# Altium PCB auto.PcbDoc
Units mm, origin at the board's own origin, x right, y up, seen from the top; angles counter-clockwise.
Board outline 78.5 x 62.5 mm, 2 copper layers (Top Layer, Bottom Layer), stack 1.671 mm thick; 17 components, 10 nets, 71 pads, 0 vias.
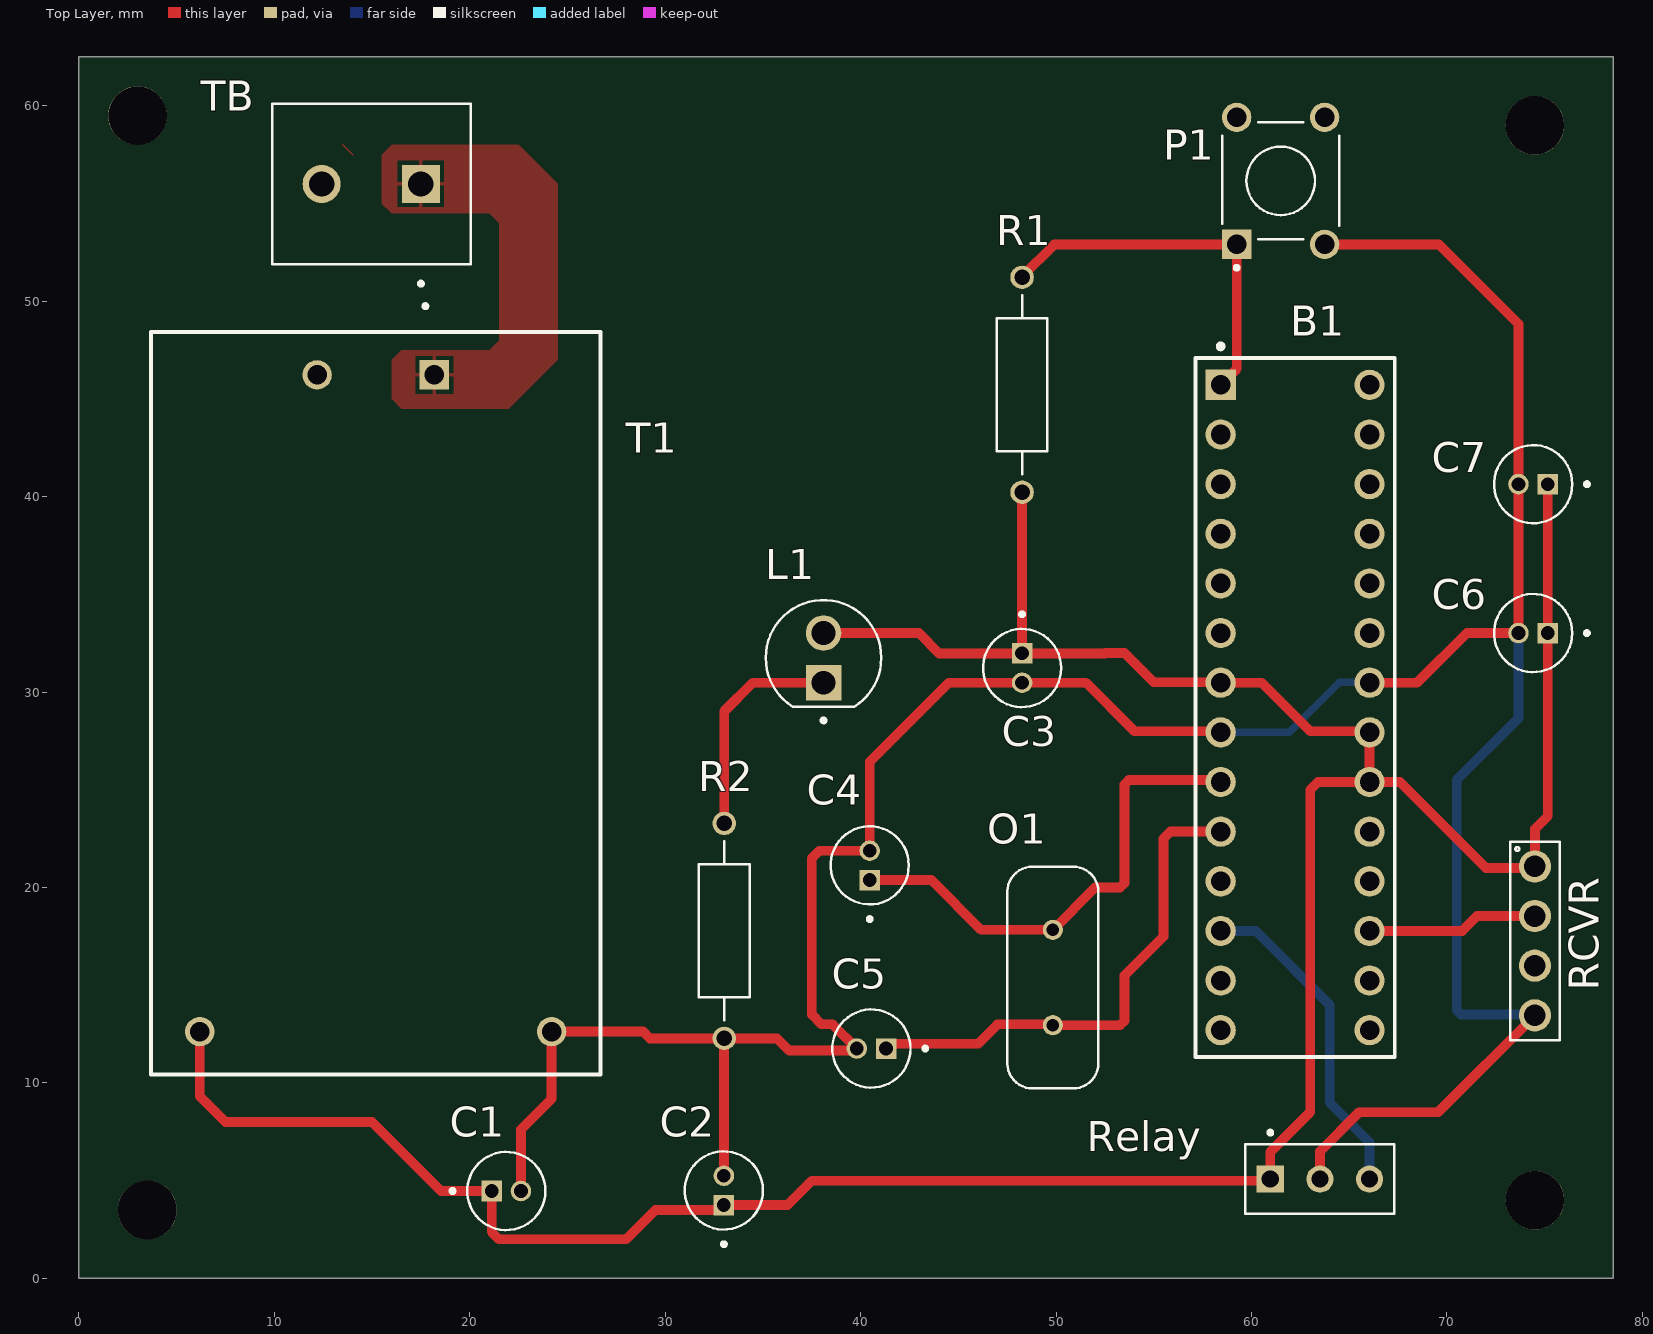
[diagram p0: Top Layer view]
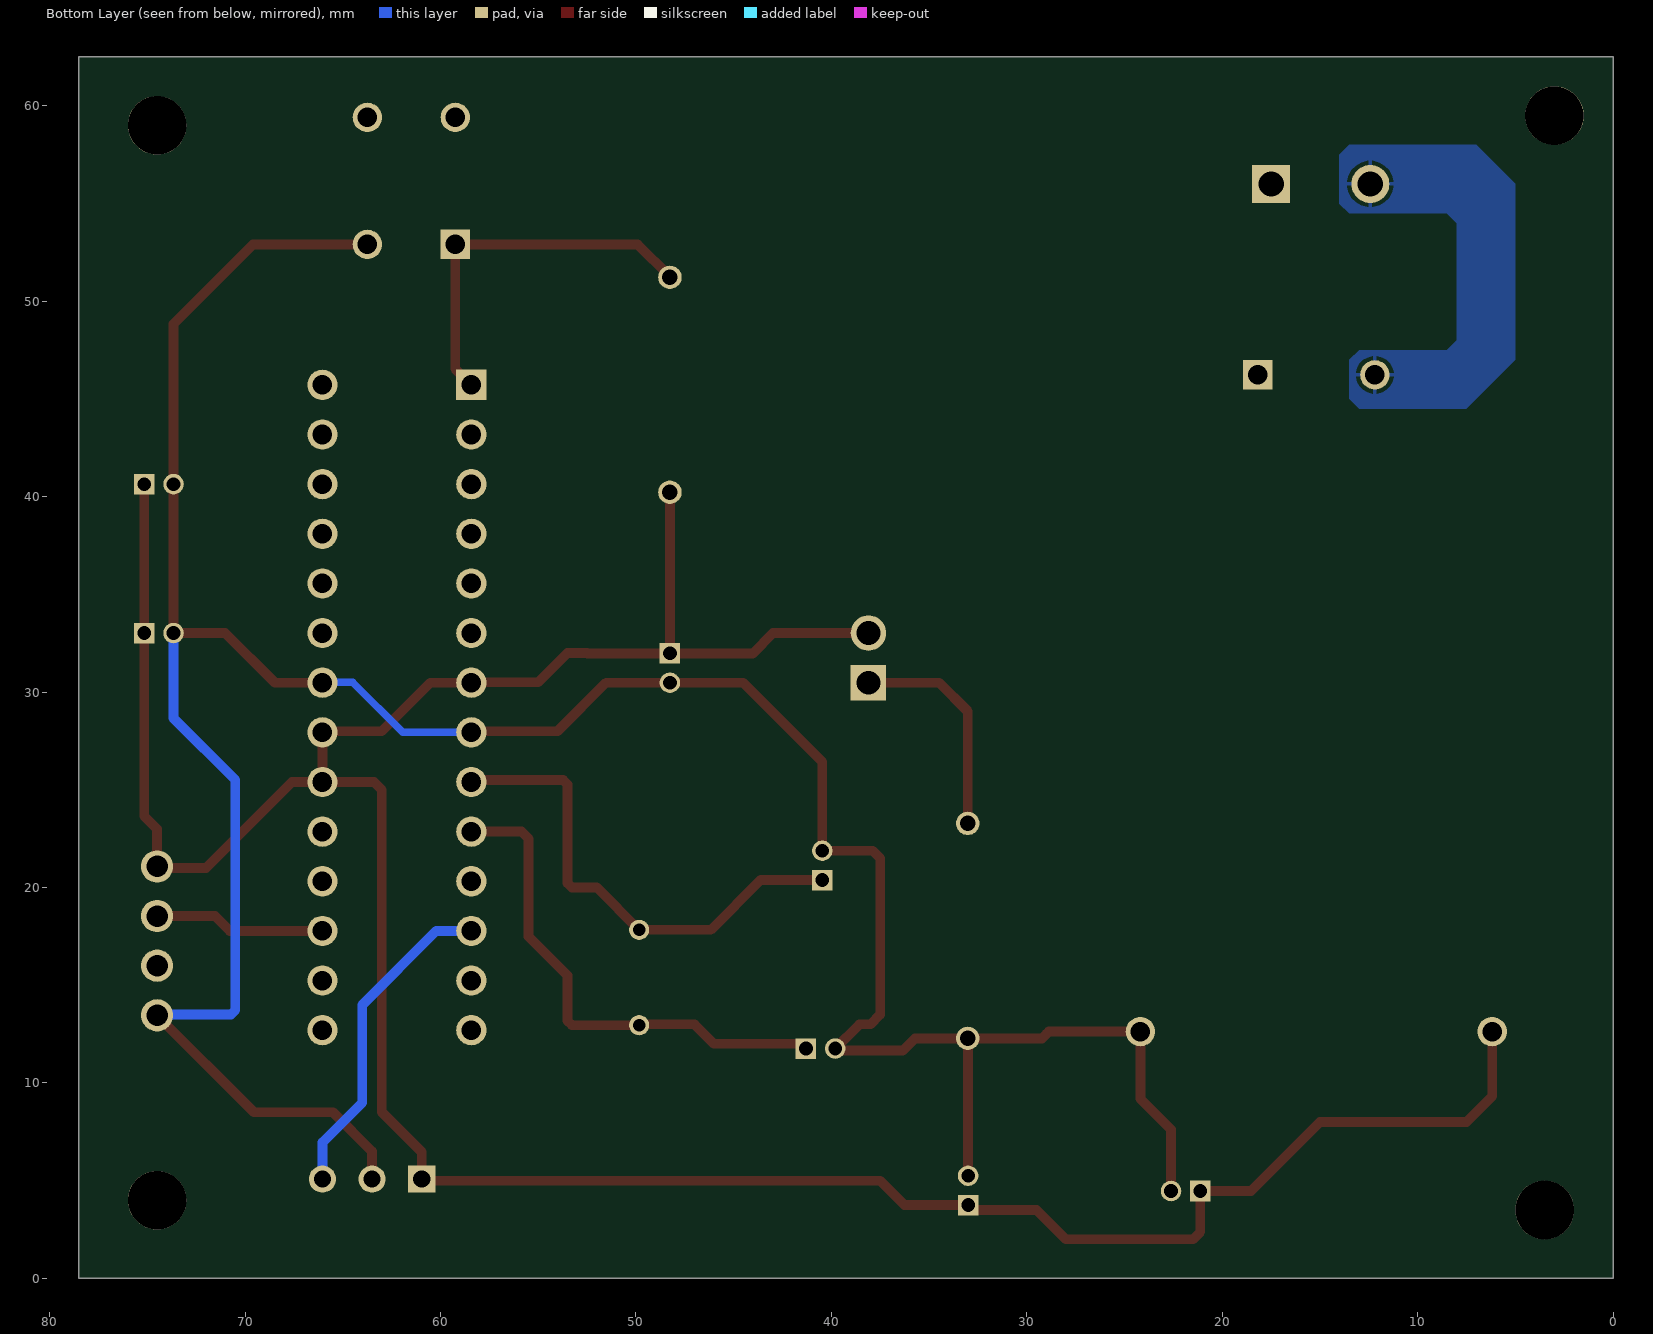
[diagram p1: Bottom Layer view, seen from below]
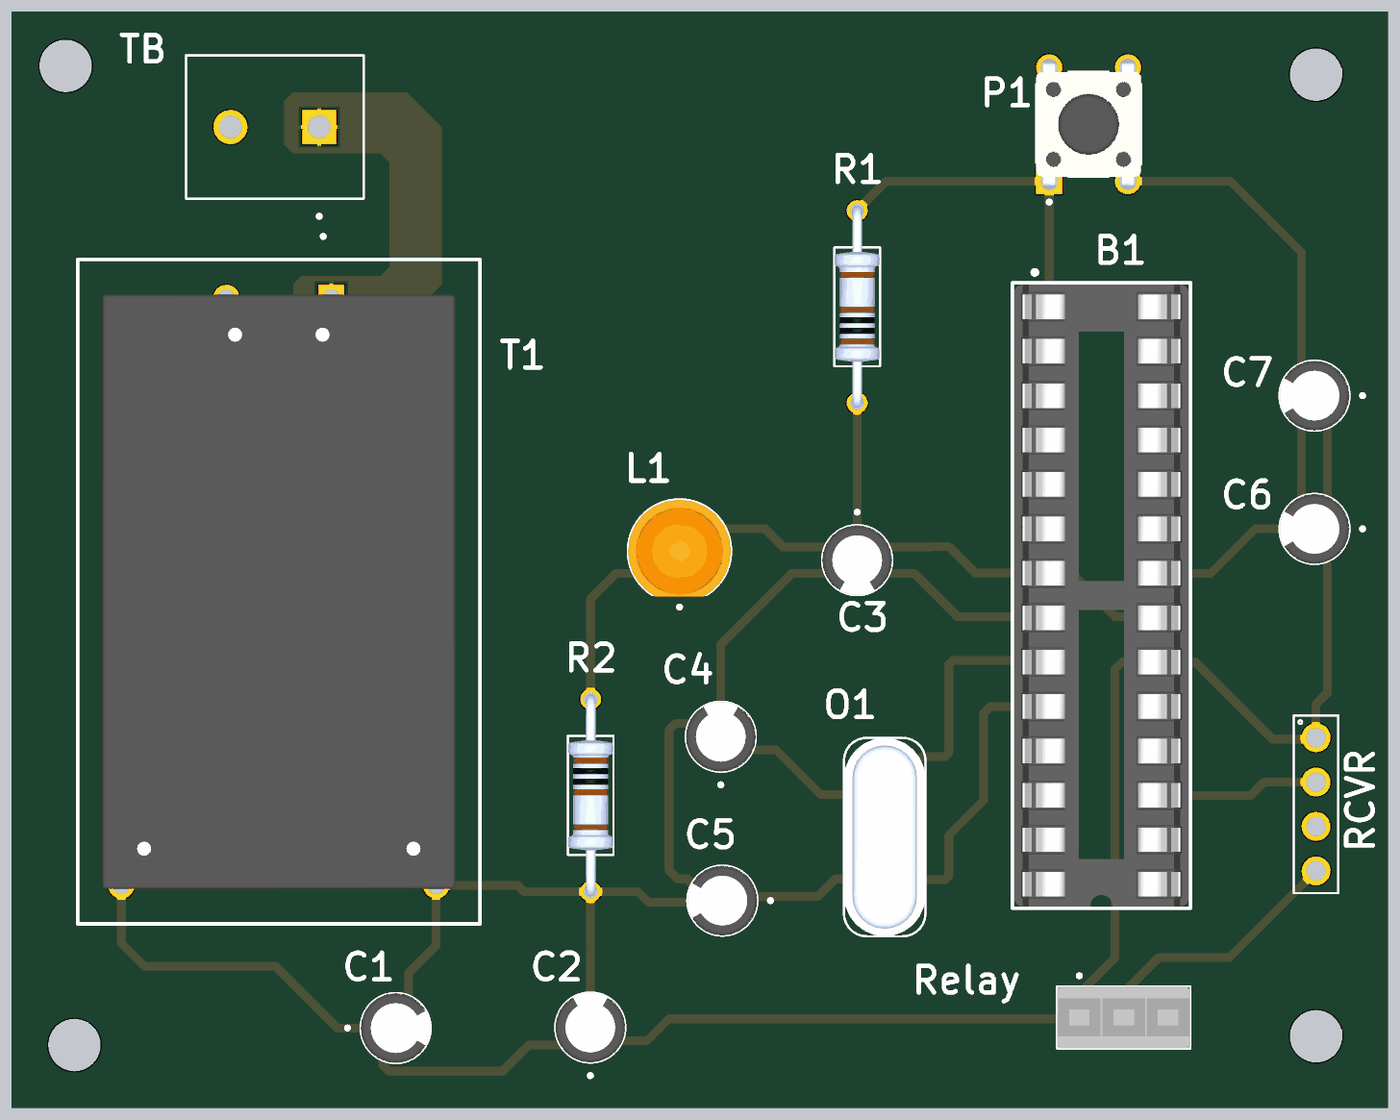
[diagram p2: 3D render of the assembled board from above, using the file's embedded part models]

## Layer stack, top to bottom
Top Solder: solder mask 0.0102, Solder Resist, Dk 3.5
Top Layer: signal copper 0.0356
Dielectric 1: dielectric 1.6, FR-4, Dk 4.8
Bottom Layer: signal copper 0.0356
Bottom Solder: solder mask 0.0102, Solder Resist, Dk 3.5

## Board outline
0,0 78.5,0 78.5,62.5 0,62.5

## Design rules (kind name [scope] priority, off if disabled: settings)
BoardOutlineClearance [All] p1: gap=0.2 ignorepadtopadclearanceinfootprint=FALSE
Clearance [All] p1: gap=0.203 ignorepadtopadclearanceinfootprint=FALSE except(0.25: Arc-Hole Track-Hole SMDPad-Hole THPad-Hole Via-Hole Fill-Hole Poly-Hole Region-Hole Text-Hole)
ComponentClearance [All] p1: gap=0.127 collisioncheckmode=3 verticalgap=0.127 showdistances=TRUE
DiffPairsRouting [All] p1: maxlimit=0.381 minlimit=0.203 mostfreqgap=0.203 toplayer_minwidth=0.203 toplayer_maxwidth=25.4 toplayer_prefwidth=0.203 bottomlayer_minwidth=0.203 bottomlayer_maxwidth=25.4 bottomlayer_prefwidth=0.203 maxuncoupledlength=12.7
Height [All] p1: minheight=0 maxheight=1816.048 prefheight=12.7
HoleSize [All] p1: absolutevalues=TRUE maxlimit=6.3 minlimit=0.3 maxpercent=80.000 minpercent=20.000
HoleToHoleClearance [All] p1: gap=0.25 allowstackedmicrovias=FALSE
MinimumAnnularRing [All] p1: minimumring=0.076
MinimumSolderMaskSliver [All] p1: minsoldermaskwidth=0
PlaneClearance [All] p1: clearance=0.203
PlaneConnect PlaneConnectPowerPads [InPadClass('PowerPads')] p1: planeconnectstyle=Direct reliefexpansion=0.508 reliefentries=4 reliefconductorwidth=0.254 reliefairgap=0.254
PlaneConnect [All] p2: pad.planeconnectstyle=Relief pad.reliefexpansion=0.3 pad.reliefentries=4 pad.reliefconductorwidth=0.203 pad.reliefairgap=0.203 via.planeconnectstyle=Direct via.reliefexpansion=0.3 via.reliefentries=4 via.reliefconductorwidth=0.127 via.reliefairgap=0.127
PolygonConnect PolygonConnectPowerPads [All vs (InPadClass('PowerPads'))] p1: connectstyle=Direct reliefconductorwidth=0.254 reliefentries=4 polygonreliefangle="90 Angle" airgapwidth=0.254
PolygonConnect [All] p2: thpad.connectstyle=Relief thpad.reliefconductorwidth=0.203 thpad.reliefentries=4 thpad.polygonreliefangle="90 Angle" thpad.airgapwidth=0.203 smdpad.connectstyle=Relief smdpad.reliefconductorwidth=0.203 smdpad.reliefentries=4 smdpad.polygonreliefangle="90 Angle" smdpad.airgapwidth=0.203 via.connectstyle=Direct via.reliefconductorwidth=0.127 via.reliefentries=4 via.polygonreliefangle="90 Angle" via.airgapwidth=0.127
RoutingVias [All] p1: holewidth=0.3 width=0.6 viastyle="Through Hole" minholewidth=0.3 minwidth=0.6 maxholewidth=0.6 maxwidth=6.6
SilkToSilkClearance [All] p1: silktosilkclearance=0
SilkToSolderMaskClearance [IsPad] p1: minsilkscreentomaskgap=0.127 clearancetoexposedcopper=TRUE
SolderMaskExpansion [All] p1: expansion=0.075 istentingtop=FALSE
Width [All] p1: maxlimit=25.4 minlimit=0.203 preferedwidth=0.203 minimp=50.000000 maximp=50.000000 favimp=50.000000
20 further rules are at their usual default settings.

## Components (designator, comment, footprint, x,y, rotation, side; value= is the part's Value field where it differs from the comment)
B1 "1-2199298-8" FP-1-2199298-9-MFG 62.23,29.21 r270 top
C1 "K102K15X7RF5TL2" 10UF_CAPACITOR 21.869,4.47 r0 top value=1nF
C2 "EEA-GA1C100" 10UF_CAPACITOR 33,4.5 r90 top
C3 "EEA-GA1C100" 10UF_CAPACITOR 48.26,31.23 r270 top
C4 "S220K25SL0N63L6R" 10UF_CAPACITOR 40.462,21.133 r90 top
C5 "S220K25SL0N63L6R" 10UF_CAPACITOR 40.55,11.76 r180 top
C6 "EEA-GA1C100" 10UF_CAPACITOR 74.41,33.02 r180 top
C7 "EEA-GA1C100" 10UF_CAPACITOR 74.41,40.64 r180 top
L1 "WP7113SRD/J4" LEDRD254W57D500H1070 38.1,31.75 r90 top
O1 "ECS-160-20-4_1" OSCILLATOR 49.835,15.394 r270 top value=16MHz
P1 "COM-00097" P_BUTTON 61.493,56.159 r90 top
R1 "CFM12JT1K00" RESISTER 48.26,45.72 r90 top value=1kR
R2 "CFM12JT220R" RESISTER 33.02,17.78 r270 top value=220R
RCVR "61300411121" 61300411121 74.5,17.27 r270 top
Relay "61300311121" FEMALE 63.5,5.08 r0 top
T1 "Transformer" HILINK 15.186,29.428 r270 top
TB "TB006-508-02BE" TERMINALBOX 17.5,56 r180 top

## Footprints (in the part's own frame and the unit in brackets; to place one, negate y for a bottom-side part, rotate by r counter-clockwise, add the part's x,y. Pads: shape width x height; smd on the part's side, far side on the other; paste and mask are expansions set on the pad)
10UF_CAPACITOR [mm]
  rect 1.05x1.05 hole 0.7: 1(-0.75,0)
  round 1.05 hole 0.7: 2(0.75,0)
  silkscreen extent -2.85,-2 2,2, body extent -2,-2 2,2, height 7
61300411121 [mm]
  round 1.65 hole 1.1: 1(-3.81,0) 2(-1.27,0) 3(1.27,0) 4(3.81,0)
  silkscreen extent -5.08,-1.27 5.08,1.27
FEMALE [mm]
  rect 1.388x1.388 hole 0.88: 1(-2.54,0)
  round 1.388 hole 0.88: 2(0,0) 3(2.54,0)
  silkscreen extent -3.81,-1.78 3.81,2.48, body extent -3.81,-1.78 3.81,1.78, height 6.74
FP-1-2199298-9-MFG [mm]
  rect 1.55x1.55 hole 1 paste-1000 mask+0: 1(-16.51,-3.81)
  round 1.55 hole 1 paste-1000 mask+0: 2(-13.97,-3.81) 3(-11.43,-3.81) 4(-8.89,-3.81) 5(-6.35,-3.81) 6(-3.81,-3.81) 7(-1.27,-3.81) 8(1.27,-3.81) 9(3.81,-3.81) 10(6.35,-3.81) 11(8.89,-3.81) 12(11.43,-3.81) 13(13.97,-3.81) 14(16.51,-3.81) 15(16.51,3.81) 16(13.97,3.81) 17(11.43,3.81) 18(8.89,3.81) 19(6.35,3.81) 20(3.81,3.81) 21(1.27,3.81) 22(-1.27,3.81) 23(-3.81,3.81) 24(-6.35,3.81) 25(-8.89,3.81) 26(-11.43,3.81) 27(-13.97,3.81) 28(-16.51,3.81)
  silkscreen extent -18.6,-5.1 17.88,5.1, body extent -17.98,-5.2 17.98,5.2, height 0.25
HILINK [mm]
  rect 1.508x1.508 / inner round 1.508 / far side rect 1.508x1.508 hole 1: 1(-16.8,3)
  round 1.508 hole 1: 2(-16.8,-3) 3(16.8,9) 4(16.8,-9)
  silkscreen extent -20.42,-11.5 19,11.5, body extent -17,-10.1 17,10.1, height 15
LEDRD254W57D500H1070 [mm]
  round 1.815 hole 1.21: 1(1.27,0)
  rect 1.815x1.815 / inner round 1.815 / far side rect 1.815x1.815 hole 1.21: 2(-1.27,0)
  silkscreen extent -3.3,-2.96 2.96,2.96, body extent -2.6,-2.95 2.95,2.95, height 9.1
OSCILLATOR [mm]
  round 1.03 hole 0.63: 1(-2.44,0) 2(2.44,0)
  silkscreen extent -5.68,-2.33 5.68,2.33, body extent -5.68,-2.32 5.68,2.32, height 3.51
P_BUTTON [mm]
  rect 1.498x1.498 / inner round 1.498 / far side rect 1.498x1.498 hole 0.99: 1(-3.25,2.25)
  round 1.498 hole 0.99: 2(-3.25,-2.25) 3(3.25,-2.25) 4(3.25,2.25)
  silkscreen extent -4.54,-3 3,3, body extent -3.9,-3 3.9,3, height 5.01
RESISTER [mm]
  round 1.2 hole 0.8: 1(-5.5,0) 2(5.5,0)
  silkscreen extent -4.58,-1.3 4.58,1.3, body extent -5.77,-1.3 5.77,1.3, height 2.6
TERMINALBOX [mm]
  rect 1.95x1.95 / inner round 1.95 / far side rect 1.95x1.95 hole 1.3: 1(0,0)
  round 1.95 hole 1.3: 2(5.08,0)
  silkscreen extent -2.54,-4.1 7.62,5.2

## Part data
B1: "IC Socket", Manufacturer="TE Connectivity", Manufacturer Series=2199298, Supplier Part Number=571-1-2199298-8, Category="IC and Component Sockets", ComponentLink1Description=https://www.te.com:443/usa-en/product-1-2199298-8.datasheet.pdf?src-supplier=IHS+Markit, ComponentLink1URL=https://www.te.com:443/usa-en/product-1-2199298-8.datasheet.pdf?src-supplier=IHS+Markit, ComponentLink2Description=http://www.alliedelec.com/m/d/1cf61418f54f295ea6d222d573753863.pdf?src-supplier=Allied+Electronics, ComponentLink2URL=http://www.alliedelec.com/m/d/1cf61418f54f295ea6d222d573753863.pdf?src-supplier=Allied+Electronics, ComponentLink3Description=https://www.te.com/commerce/DocumentDelivery/DDEController?Action=srchrtrv&amp;DocNm=2199298&amp;DocType=Customer+Drawing&amp;DocLang=English&src-supplier=Digi-Key, ComponentLink3URL=https://www.te.com/commerce/DocumentDelivery/DDEController?Action=srchrtrv&amp;DocNm=2199298&amp;DocType=Customer+Drawing&amp;DocLang=English&src-supplier=Digi-Key, ComponentLink4Description=http://www.te.com/commerce/DocumentDelivery/DDEController?Action=showdoc&DocId=Customer+Drawing%7F2199298%7FA%7Fpdf%7FEnglish%7FENG_CD_2199298_A_baseFilename.pdf&src-supplier=Avnet, ComponentLink4URL=http://www.te.com/commerce/DocumentDelivery/DDEController?Action=showdoc&DocId=Customer+Drawing%7F2199298%7FA%7Fpdf%7FEnglish%7FENG_CD_2199298_A_baseFilename.pdf&src-supplier=Avnet, Contact Finish - Mating=TIN, Contact Material=Bronze, Device Socket Type="IC SOCKET", Manufacturer Part Number=1-2199298-8, Pricing="1=0.39, 10=0.379, 50=0.379, 100=0.379, 1000=0.379, 10000=0.307 (USD)", Reach SVHC Compliant=Yes, RoHS=Yes, RoHS Compliant=Yes, Stock=5353, Supplier=Mouser
C1: "Ceramic Capacitor, Multilayer, Ceramic, 50V, 10% +Tol, 10% -Tol, X7R, 15% TC, 0.001uF, Through Hole Mount", Capacitance=1nF, Capacitor Type=Ceramic, Manufacturer="Vishay BCcomponents", Max Operating Temperature=125°C, Min Operating Temperature=-55°C, Package Shape=Rectangular, Package Style=RadialMeter, Rated DC Voltage (URdc)=50V, Supplier Part Number=594-K102K15X7RF5TL2, Temperature Characteristics Code=X7R, Tolerance  (fill in as +-)=10%, Category="Ceramic Capacitors", ComponentLink1Description=https://datasheet.ciiva.com:443/pdfs/VipMasterIC/IC/VISH/VISHS88539/VISHS88539-1.pdf?src-supplier=IHS+Markit, ComponentLink1URL=https://datasheet.ciiva.com:443/pdfs/VipMasterIC/IC/VISH/VISHS88539/VISHS88539-1.pdf?src-supplier=IHS+Markit, ComponentLink2Description=https://datasheet.ciiva.com/145/kseries-145600.pdf?src-supplier=Digi-Key, ComponentLink2URL=https://datasheet.ciiva.com/145/kseries-145600.pdf?src-supplier=Digi-Key, ComponentLink3Description=https://datasheet.ciiva.com/18442/70121924-18442616.pdf?src-supplier=Allied+Electronics, ComponentLink3URL=https://datasheet.ciiva.com/18442/70121924-18442616.pdf?src-supplier=Allied+Electronics, ComponentLink4Description=https://datasheet.ciiva.com/46394/1756139-46394540.pdf?src-supplier=Element14, ComponentLink4URL=https://datasheet.ciiva.com/46394/1756139-46394540.pdf?src-supplier=Element14, ComponentLink5Description=https://datasheet.ciiva.com/7974/1682830-7974760.pdf?src-supplier=Element14, ComponentLink5URL=https://datasheet.ciiva.com/7974/1682830-7974760.pdf?src-supplier=Element14, ComponentLink6Description=https://datasheet.ciiva.com/145/kseries-145599.pdf?src-supplier=Digi-Key, ComponentLink6URL=https://datasheet.ciiva.com/145/kseries-145599.pdf?src-supplier=Digi-Key, Dielectric Material=Ceramic, Height=5.58mm, JESD-609 Code=e3, Length=4mm, Manufacturer Part Number=K102K15X7RF5TL2, Mounting Technology="Through Hole", Multilayer=Yes, Packaging="Tape and Reel", Pins=2, Pricing="1=0.23, 10=0.104, 50=0.104, 100=0.06, 1000=0.053, 10000=0.041 (USD)", Reach SVHC Compliant=Yes, RoHS=Yes, RoHS Compliant=Yes, Stock=24201, Supplier=Mouser, Terminal Finish=Tin, Terminal Pitch=2.5mm, Termination=Wire, Tolerance (fill in as +-)=10%, Voltage=50V, Width=2.5mm
C2 C3 C6 C7: "Aluminum Electrolytic Capacitor, Polarized, Aluminum (wet), 16V, 20% +Tol, 20% -Tol, 10uF, Through Hole Mount", Capacitance=10uF, Capacitor Type=Aluminium, Leakage Current=3uA, Manufacturer=Panasonic, Manufacturer Series=GA, Max Operating Temperature=105°C, Min Operating Temperature=-55°C, Package Shape=Cylindrical, Package Style=RadialMeter, Rated DC Voltage (URdc)=16V, Ripple Current=30mA, Supplier Part Number=667-EEA-GA1C100, Tolerance  (fill in as +-)=20%, Category="Aluminum Electrolytic Capacitors", ComponentLink1Description=https://datasheet.ciiva.com:443/pdfs/VipMasterIC/IC/PANA/PANA-S-A0007980152/PANA-S-A0007980152-1.pdf?src-supplier=IHS+Markit, ComponentLink1URL=https://datasheet.ciiva.com:443/pdfs/VipMasterIC/IC/PANA/PANA-S-A0007980152/PANA-S-A0007980152-1.pdf?src-supplier=IHS+Markit, ComponentLink2Description=https://datasheet.ciiva.com/11783/0900766b800bd184-11783675.pdf?src-supplier=Rs, ComponentLink2URL=https://datasheet.ciiva.com/11783/0900766b800bd184-11783675.pdf?src-supplier=Rs, ComponentLink3Description=https://datasheet.ciiva.com/30132/61aba0000ce99-30132280.pdf?src-supplier=Onlinecomponents.com, ComponentLink3URL=https://datasheet.ciiva.com/30132/61aba0000ce99-30132280.pdf?src-supplier=Onlinecomponents.com, ComponentLink4Description=https://datasheet.ciiva.com/2984/aba0000ce99-2984970.pdf?src-supplier=Avnet, ComponentLink4URL=https://datasheet.ciiva.com/2984/aba0000ce99-2984970.pdf?src-supplier=Avnet, ComponentLink5Description=https://datasheet.ciiva.com/14606/70256146-14606495.pdf?src-supplier=Allied+Electronics, ComponentLink5URL=https://datasheet.ciiva.com/14606/70256146-14606495.pdf?src-supplier=Allied+Electronics, ComponentLink6Description=https://datasheet.ciiva.com/43461/1521263-43461069.pdf?src-supplier=Farnell, ComponentLink6URL=https://datasheet.ciiva.com/43461/1521263-43461069.pdf?src-supplier=Farnell, ComponentLink7Description=https://datasheet.ciiva.com/24024/aba0000ce99-48764-24024622.pdf?src-supplier=Mouser, ComponentLink7URL=https://datasheet.ciiva.com/24024/aba0000ce99-48764-24024622.pdf?src-supplier=Mouser, Diameter=4mm, Dielectric Material=Aluminium, JESD-609 Code=e3, Length=7mm, Manufacturer Part Number=EEA-GA1C100, Mounting Technology="Through Hole", Packaging=Bulk, Pins=2, Polarity=Polarized, Pricing="1=0.32, 10=0.216, 50=0.144, 100=0.123, 1000=0.086, 10000=0.086 (USD)", Reach SVHC Compliant=Yes, RoHS=Yes, RoHS Compliant=Yes, Series=EEA-GA, Stock=3224, Supplier=Mouser, Tan Delta=0.18, Terminal Finish=Tin, Terminal Pitch=1.5mm, Termination=Wire, Tolerance (fill in as +-)=20%, Voltage=16V
C4 C5: "Ceramic Capacitor, Ceramic, 1000V, 10% +Tol, 10% -Tol, SL0, 120ppm/Cel TC, 0.000022uF, Through Hole Mount", Capacitance=22pF, Capacitor Type=Ceramic, Manufacturer="Vishay BCcomponents", Supplier Part Number=594-S220K25SL0N63L6R, Voltage=16V, Category="Ceramic Capacitors", ComponentLink1Description=https://datasheet.ciiva.com:443/pdfs/VipMasterIC/IC/VISH/VISH-S-A0003941534/VISH-S-A0003941534-1.pdf?src-supplier=IHS+Markit, ComponentLink1URL=https://datasheet.ciiva.com:443/pdfs/VipMasterIC/IC/VISH/VISH-S-A0003941534/VISH-S-A0003941534-1.pdf?src-supplier=IHS+Markit, ComponentLink2Description=https://datasheet.ciiva.com/148/geninfo-cd-rfi-safcaps-148963.pdf?src-supplier=Digi-Key, ComponentLink2URL=https://datasheet.ciiva.com/148/geninfo-cd-rfi-safcaps-148963.pdf?src-supplier=Digi-Key, ComponentLink3Description=https://datasheet.ciiva.com/7974/gapkap-7974888.pdf?src-supplier=Element14, ComponentLink3URL=https://datasheet.ciiva.com/7974/gapkap-7974888.pdf?src-supplier=Element14, Dielectric Material=Ceramic, Manufacturer Part Number=S220K25SL0N63L6R, Pins=2, Pricing="1=0.4, 10=0.197, 50=0.197, 100=0.169, 1000=0.107, 10000=0.095 (USD)", RoHS=Yes, RoHS Compliant=Yes, Stock=23582, Supplier=Mouser
L1: "LED Uni-Color SB. Red 660nm 2-Pin T-1 3/4 Bulk", Manufacturer=Kingbright, Supplier Part Number=754-2139-ND, Category=LEDs, ComponentLink1Description=http://www.kingbrightusa.com/images/catalog/SPEC/WP7113SRD-J4.pdf?src-supplier=Digi-Key, ComponentLink1URL=http://www.kingbrightusa.com/images/catalog/SPEC/WP7113SRD-J4.pdf?src-supplier=Digi-Key, Manufacturer Part Number=WP7113SRD/J4, Pricing="1=0.69, 10=0.448, 100=0.2936, 1000=0.23175, 2000=0.2163, 5000=0.20858, 10000=0.20549, 25000=0.20085 (USD)", RoHS=No, Stock=14375, Supplier=Digi-Key
O1: Package=None, Availability=Unavailable, MP=ECS-160-20-4, Price=None
P1: "CONN HEADER SMD 28POS 0.8MM", Manufacturer=SparkFun, Supplier Part Number=1568-COM-00097-ND, Category="Tactile Switches", Manufacturer Part Number=COM-00097, Pricing="1=0.45 (USD)", RoHS=No, Supplier=Digi-Key
R1: "Fixed Resistor, Carbon Film, 0.5W, 1000ohm, 350V, 5% +/-Tol, -400,0ppm/Cel, Through Hole Mount", Manufacturer="Stackpole Electronics", Max Operating Temperature=155°C, Min Operating Temperature=-55°C, Package Diameter=2.3mm, Package Length=6mm, Package Shape=Tubular, Package Style=AxialMeter, Power=500mW, Rated Temperature=70°C, Resistance=1K, Resistor Type="FIXED RESISTOR", Supplier Part Number=S1KHCT-ND, Temperature Coefficient=400ppm/°C, Tolerance=5%, Working Voltage=350V, Category="Through-Hole Resistors", ComponentLink1Description=https://datasheet.ciiva.com:443/pdfs/VipMasterIC/IC/SEIE/SEIE-S-A0009883960/SEIE-S-A0009883960-1.pdf?src-supplier=IHS+Markit, ComponentLink1URL=https://datasheet.ciiva.com:443/pdfs/VipMasterIC/IC/SEIE/SEIE-S-A0009883960/SEIE-S-A0009883960-1.pdf?src-supplier=IHS+Markit, ComponentLink2Description=http://components.arrow.com/part/dataview/51859118S46073N1174?src-supplier=Arrow+Electronics, ComponentLink2URL=http://components.arrow.com/part/dataview/51859118S46073N1174?src-supplier=Arrow+Electronics, ComponentLink3Description=https://www.seielect.com/Catalog/SEI-CF_CFM.pdf?src-supplier=Digi-Key, ComponentLink3URL=https://www.seielect.com/Catalog/SEI-CF_CFM.pdf?src-supplier=Digi-Key, ComponentLink4Description=https://www.seielect.com/catalog/SEI-Packaging.pdf?src-supplier=Digi-Key, ComponentLink4URL=https://www.seielect.com/catalog/SEI-Packaging.pdf?src-supplier=Digi-Key, ComponentLink5Description=https://www.seielect.com/catalog/SEI-CF_CFM.pdf?src-supplier=Avnet, ComponentLink5URL=https://www.seielect.com/catalog/SEI-CF_CFM.pdf?src-supplier=Avnet, ComponentLink6Description=https://www.verical.com/server-webapp/html/getDatasheet?partID=470997&src-supplier=Verical, ComponentLink6URL=https://www.verical.com/server-webapp/html/getDatasheet?partID=470997&src-supplier=Verical, Construction=Tubular, JESD-609 Code=e3, Lead Diameter=0.55mm, Lead Length=28mm, Manufacturer Part Number=CFM12JT1K00, Mounting Technology="Through Hole", Packaging="Tape and Reel", Pins=2, Pricing="1=0.1, 10=0.067, 25=0.0488, 50=0.0372, 100=0.0274, 250=0.02092, 500=0.01672, 1000=0.01231 (USD)", Reach SVHC Compliant=Yes, RoHS=Yes, RoHS Compliant=Yes, Stock=145304, Supplier=Digi-Key, Technology="CARBON FILM", Terminal Finish=Tin, Termination=Wire
R2: "Fixed Resistor, Carbon Film, 0.5W, 220ohm, 350V, 5% +/-Tol, -400,0ppm/Cel, Through Hole Mount", Manufacturer="Stackpole Electronics", Max Operating Temperature=155°C, Min Operating Temperature=-55°C, Package Diameter=2.3mm, Package Length=6mm, Package Shape=Tubular, Package Style=AxialMeter, Power=500mW, Rated Temperature=70°C, Resistance=220, Resistor Type="FIXED RESISTOR", Supplier Part Number=S220HTR-ND, Temperature Coefficient=400ppm/°C, Tolerance=5%, Working Voltage=350V, Category="Through-Hole Resistors", ComponentLink1Description=https://datasheet.ciiva.com:443/pdfs/VipMasterIC/IC/SEIE/SEIE-S-A0009883960/SEIE-S-A0009883960-1.pdf?src-supplier=IHS+Markit, ComponentLink1URL=https://datasheet.ciiva.com:443/pdfs/VipMasterIC/IC/SEIE/SEIE-S-A0009883960/SEIE-S-A0009883960-1.pdf?src-supplier=IHS+Markit, ComponentLink2Description=https://www.seielect.com/catalog/SEI-CF_CFM.pdf?src-supplier=Avnet, ComponentLink2URL=https://www.seielect.com/catalog/SEI-CF_CFM.pdf?src-supplier=Avnet, ComponentLink3Description=https://www.seielect.com/Catalog/SEI-CF_CFM.pdf?src-supplier=Digi-Key, ComponentLink3URL=https://www.seielect.com/Catalog/SEI-CF_CFM.pdf?src-supplier=Digi-Key, Construction=Tubular, JESD-609 Code=e3, Lead Diameter=0.55mm, Lead Length=28mm, Manufacturer Part Number=CFM12JT220R, Mounting Technology="Through Hole", Packaging="Tape and Reel", Pins=2, Pricing="5000=0.00883, 10000=0.00767, 25000=0.00674, 50000=0.00618, 125000=0.00605 (USD)", Reach SVHC Compliant=Yes, RoHS=Yes, RoHS Compliant=Yes, Stock=15000, Supplier=Digi-Key, Technology="CARBON FILM", Terminal Finish=Tin, Termination=Wire
RCVR: "Board Connector, 4 Contact(s), 1 Row(s), Male, Straight, 0.1 inch Pitch, Solder Terminal, Locking, Black Insulator, Plug", Contact Resistance=20mR, Dielectric Withstanding Voltage (AC)=500V, Insulation Color=Black, Insulation Resistance=1GR, Manufacturer="Wurth Electronics", Max Operating Temperature=125°C, Min Operating Temperature=-40°C, Rated Current (Signal)=3A, Supplier Part Number=732-5317-ND, Body Breadth=0.1inch, Body Depth=0.1inch, Body Length=0.4inch, Body/Shell Style=PLUG, Category="Headers and Wire Housings", ComponentLink1Description=https://datasheet.ciiva.com:443/pdfs/VipMasterIC/IC/MIDC/MIDCS07676/MIDCS07676-1.pdf?src-supplier=IHS+Markit, ComponentLink1URL=https://datasheet.ciiva.com:443/pdfs/VipMasterIC/IC/MIDC/MIDCS07676/MIDCS07676-1.pdf?src-supplier=IHS+Markit, ComponentLink2Description=http://www.farnell.com/cad/1737268.pdf?src-supplier=Element14, ComponentLink2URL=http://www.farnell.com/cad/1737268.pdf?src-supplier=Element14, ComponentLink3Description=https://katalog.we-online.de/em/datasheet/6130xx11121.pdf?src-supplier=Digi-Key, ComponentLink3URL=https://katalog.we-online.de/em/datasheet/6130xx11121.pdf?src-supplier=Digi-Key, Connector Type="BOARD CONNECTOR", Contact Finish - Mating=GOLD, Contact Finish - Termination="Gold (Au) - with Nickel (Ni) barrier", Contact Gender=Male, Contact Material="Copper Alloy", Contact Pattern=RECTANGULAR, Contact Style="SQ PIN-SKT", Insulation Material=Polybutylene, JESD-609 Code=e4, Manufacturer Part Number=61300411121, Mating Contact Pitch=0.1inch, Mounting Option 1=LOCKING, Mounting Style=STRAIGHT, Mounting Technology=Board, Number Of Connectors=1, Number of Contacts=4, Number of Rows Loaded=1, PCB Contact Pattern=RECTANGULAR, Pricing="1=0.19, 10=0.163, 25=0.1352, 50=0.113, 100=0.102, 1000=0.094 (USD)", Reach SVHC Compliant=Yes, Reference Standard=UL, Reliability=COMMERCIAL, RoHS=Yes, RoHS Compliant=Yes, Stock=103058, Supplier=Digi-Key, Terminal Length=0.118inch, Terminal Pitch=2.54mm, Termination=Solder
Relay: "Board Connector, 3 Contact(s), 1 Row(s), Male, Straight, 0.1 inch Pitch, Solder Terminal, Locking, Black Insulator, Plug", Contact Resistance=20mR, Dielectric Withstanding Voltage (AC)=500V, Insulation Color=Black, Insulation Resistance=1GR, Manufacturer="Wurth Electronics", Max Operating Temperature=125°C, Min Operating Temperature=-40°C, Rated Current (Signal)=3A, Supplier Part Number=732-5316-ND, Body Breadth=0.1inch, Body Depth=0.1inch, Body Length=0.3inch, Body/Shell Style=PLUG, Category=Uncategorized, ComponentLink1Description=https://datasheet.ciiva.com:443/pdfs/VipMasterIC/IC/MIDC/MIDCS07676/MIDCS07676-1.pdf?src-supplier=IHS+Markit, ComponentLink1URL=https://datasheet.ciiva.com:443/pdfs/VipMasterIC/IC/MIDC/MIDCS07676/MIDCS07676-1.pdf?src-supplier=IHS+Markit, ComponentLink2Description=http://www.farnell.com/cad/1737268.pdf?src-supplier=Element14, ComponentLink2URL=http://www.farnell.com/cad/1737268.pdf?src-supplier=Element14, ComponentLink3Description=https://katalog.we-online.de/em/datasheet/6130xx11121.pdf?src-supplier=Digi-Key, ComponentLink3URL=https://katalog.we-online.de/em/datasheet/6130xx11121.pdf?src-supplier=Digi-Key, Connector Type="BOARD CONNECTOR", Contact Finish - Mating=GOLD, Contact Finish - Termination="Gold (Au) - with Nickel (Ni) barrier", Contact Gender=Male, Contact Material="Copper Alloy", Contact Pattern=RECTANGULAR, Contact Style="SQ PIN-SKT", Insulation Material=Polybutylene, JESD-609 Code=e4, Manufacturer Part Number=61300311121, Mating Contact Pitch=0.1inch, Mounting Option 1=LOCKING, Mounting Style=STRAIGHT, Mounting Technology=Board, Number Of Connectors=1, Number of Contacts=3, Number of Rows Loaded=1, PCB Contact Pattern=RECTANGULAR, Pricing="1=0.13, 10=0.113, 25=0.094, 50=0.079, 100=0.071, 1000=0.066 (USD)", Reach SVHC Compliant=Yes, Reference Standard=UL, Reliability=COMMERCIAL, RoHS=Yes, RoHS Compliant=Yes, Stock=184286, Supplier=Digi-Key, Terminal Length=0.118inch, Terminal Pitch=2.54mm, Termination=Solder
T1: "5V 0.6A 90VAC~265VAC 120V~350V 3W AC-DC 73% Plugin Power Modules ROHS", Output Voltage=5V, Input Volatge=230V/50Hz
TB: "Barrier Strip Terminal Block", Manufacturer="CUI Devices", Supplier Part Number=490-TB006-508-02BE, Manufacturer Part Number=TB006-508-02BE, Pricing="1=0.86, 10=0.315, 50=0.315, 100=0.301, 1000=0.21, 10000=0.175 (USD)", RoHS=Yes, Stock=47338, Supplier=Mouser

## Free pads (board coordinates)
  round 3 hole 3 unplated: 8(74.5,59) 9(3,59.5) 10(3.5,3.5) 11(74.5,4)

## Nets (pads, with @x,y where several pads share a name; then routed paths per layer and width w, separated by ;. In a path a pad name is that pad's centre, name@x,y a point inside that pad or via, vN(x,y) a via of type N, cw(c..) or ccw(c..) an arc to the next point about the centre after c; other vN are vias at no path point)
+5V: B1.7 B1.20 B1.21 C1.1 C2.1 C3.1 C6.1 C7.1 L1.1 R1.1 RCVR.1 Relay.1 T1.4 | length 158.6
  Top Layer w0.5: T1.4 6.186,9.314 7.5,8 15,8 18.53,4.47 C1.1 21.119,2.381 21.5,2 28,2 29.5,3.5 32.75,3.5 C2.1 36.25,3.75 37.5,5 60.88,5 Relay.1 60.96,6.46 63,8.5 63,25 63.4,25.4 B1.20 ; L1.1 42.98,33.02 44.02,31.98 C3.1 ; R1.1 C3.1 ; C7.1 C6.1 75.16,23.66 74.5,23 RCVR.1 74.42,21 72,21 67.6,25.4 B1.20 ; C3.1 52.48,31.98 52.5,32 53.5,32 55,30.5 58.4,30.5 B1.7 60.52,30.48 63,28 65.98,28 B1.21 B1.20
GND: B1.8 B1.22 C1.2 C2.2 C3.2 C4.2 C5.2 C6.2 C7.2 P1.2 R2.2 RCVR.4 Relay.2 T1.3 | length 156.1
  Top Layer w0.5: C1.2 22.619,7.619 24.186,9.186 T1.3 28.872,12.628 29,12.5 29.22,12.28 R2.2 ; C2.2 33.01,5.26 33.01,12.27 R2.2 ; B1.8 58.36,28 54,28 51.52,30.48 C3.2 44.52,30.48 40.462,26.422 C4.2 37.883,21.883 37.5,21.5 37.5,13.5 38,13 38.561,13 C5.2 39.698,11.658 36.342,11.658 35.72,12.28 R2.2 ; Relay.2 63.5,6.5 65.5,8.5 69.54,8.5 RCVR.4 ; P1.2 69.591,52.909 73.66,48.84 C7.2 C6.2 71.02,33.02 68.48,30.48 B1.22
  Bottom Layer w0.381: B1.8 61.94,27.94 64.5,30.5 66.02,30.5 B1.22
  Bottom Layer w0.5: C6.2 73.66,28.66 70.5,25.5 70.5,13.723 70.723,13.5 74.46,13.5 RCVR.4
NetB1_1: B1.1 P1.1 R1.2 | length 19.2
  Top Layer w0.5: R1.2 48.26,51.26 49.909,52.909 P1.1 59.243,46.543 B1.1
NetB1_9: B1.9 C4.1 O1.1 | length 25.2
  Top Layer w0.5: C4.1 43.617,20.383 46.166,17.834 O1.1 52.001,20 53.277,20 53.5,20.223 53.5,25.277 53.723,25.5 58.32,25.5 B1.9
NetB1_10: B1.10 C5.1 O1.2 | length 26
  Top Layer w0.5: C5.1 41.54,12 46,12 47,13 49.789,13 O1.2 53.277,12.954 53.5,13.177 53.5,15.5 55.5,17.5 55.5,22.5 55.86,22.86 B1.10
NetB1_12: B1.12 Relay.3 | length 16.9
  Bottom Layer w0.5: B1.12 60.22,17.78 64,14 64,9 66.04,6.96 Relay.3
NetB1_17: B1.17 RCVR.2 | length 8.8
  Top Layer w0.5: B1.17 70.78,17.78 71.54,18.54 RCVR.2
NetL1_2: L1.2 R2.1 | length 11.4
  Top Layer w0.5: R2.1 33.02,29.02 34.48,30.48 L1.2
NetT1_1: T1.1 TB.1
NetT1_2: T1.2 TB.2
pads on no net: B1.2 B1.3 B1.4 B1.5 B1.6 B1.11 B1.13 B1.14 B1.15 B1.16 B1.18 B1.19 B1.23 B1.24 B1.25 B1.26 B1.27 B1.28 P1.3 P1.4 RCVR.3

## Polygon pours and split planes (outlines as drawn)
NetT1_1 on Top Layer "NETT1_1_L01_P019" (solid, pour order 19): 16,58 15.5,57.5 15.5,55 16,54.5 21,54.5 21.5,54 21.5,48 21,47.5 16.5,47.5 16,47 16,45 16.5,44.5 22,44.5 24.5,47 24.5,56 22.5,58
NetT1_2 on Top Layer "NETT1_2_L01_P017" (solid, pour order 17): 13.5,58 14,57.5
NetT1_2 on Bottom Layer "NETT1_2_L02_P023" (solid, pour order 23): 13.5,58 14,57.5 14,55 13.5,54.5 8.5,54.5 8,54 8,48 8.5,47.5 13,47.5 13.5,47 13.5,45 13,44.5 7.5,44.5 5,47 5,56 7,58

## Silkscreen, mask and mechanical layers (free items; w line width, h text height)
Board:
  the board outline again, w0.2